# Altium PCB SDP21_Main_Board_PCB.PcbDoc
Units mil, origin at the board's own origin, x right, y up, seen from the top; angles counter-clockwise.
Board outline 3300 x 3200 mil, 2 copper layers (Top Layer, Bottom Layer); 35 components, 85 nets, 246 pads, 33 vias.
Unrouted connection lines stored in the file: 34.
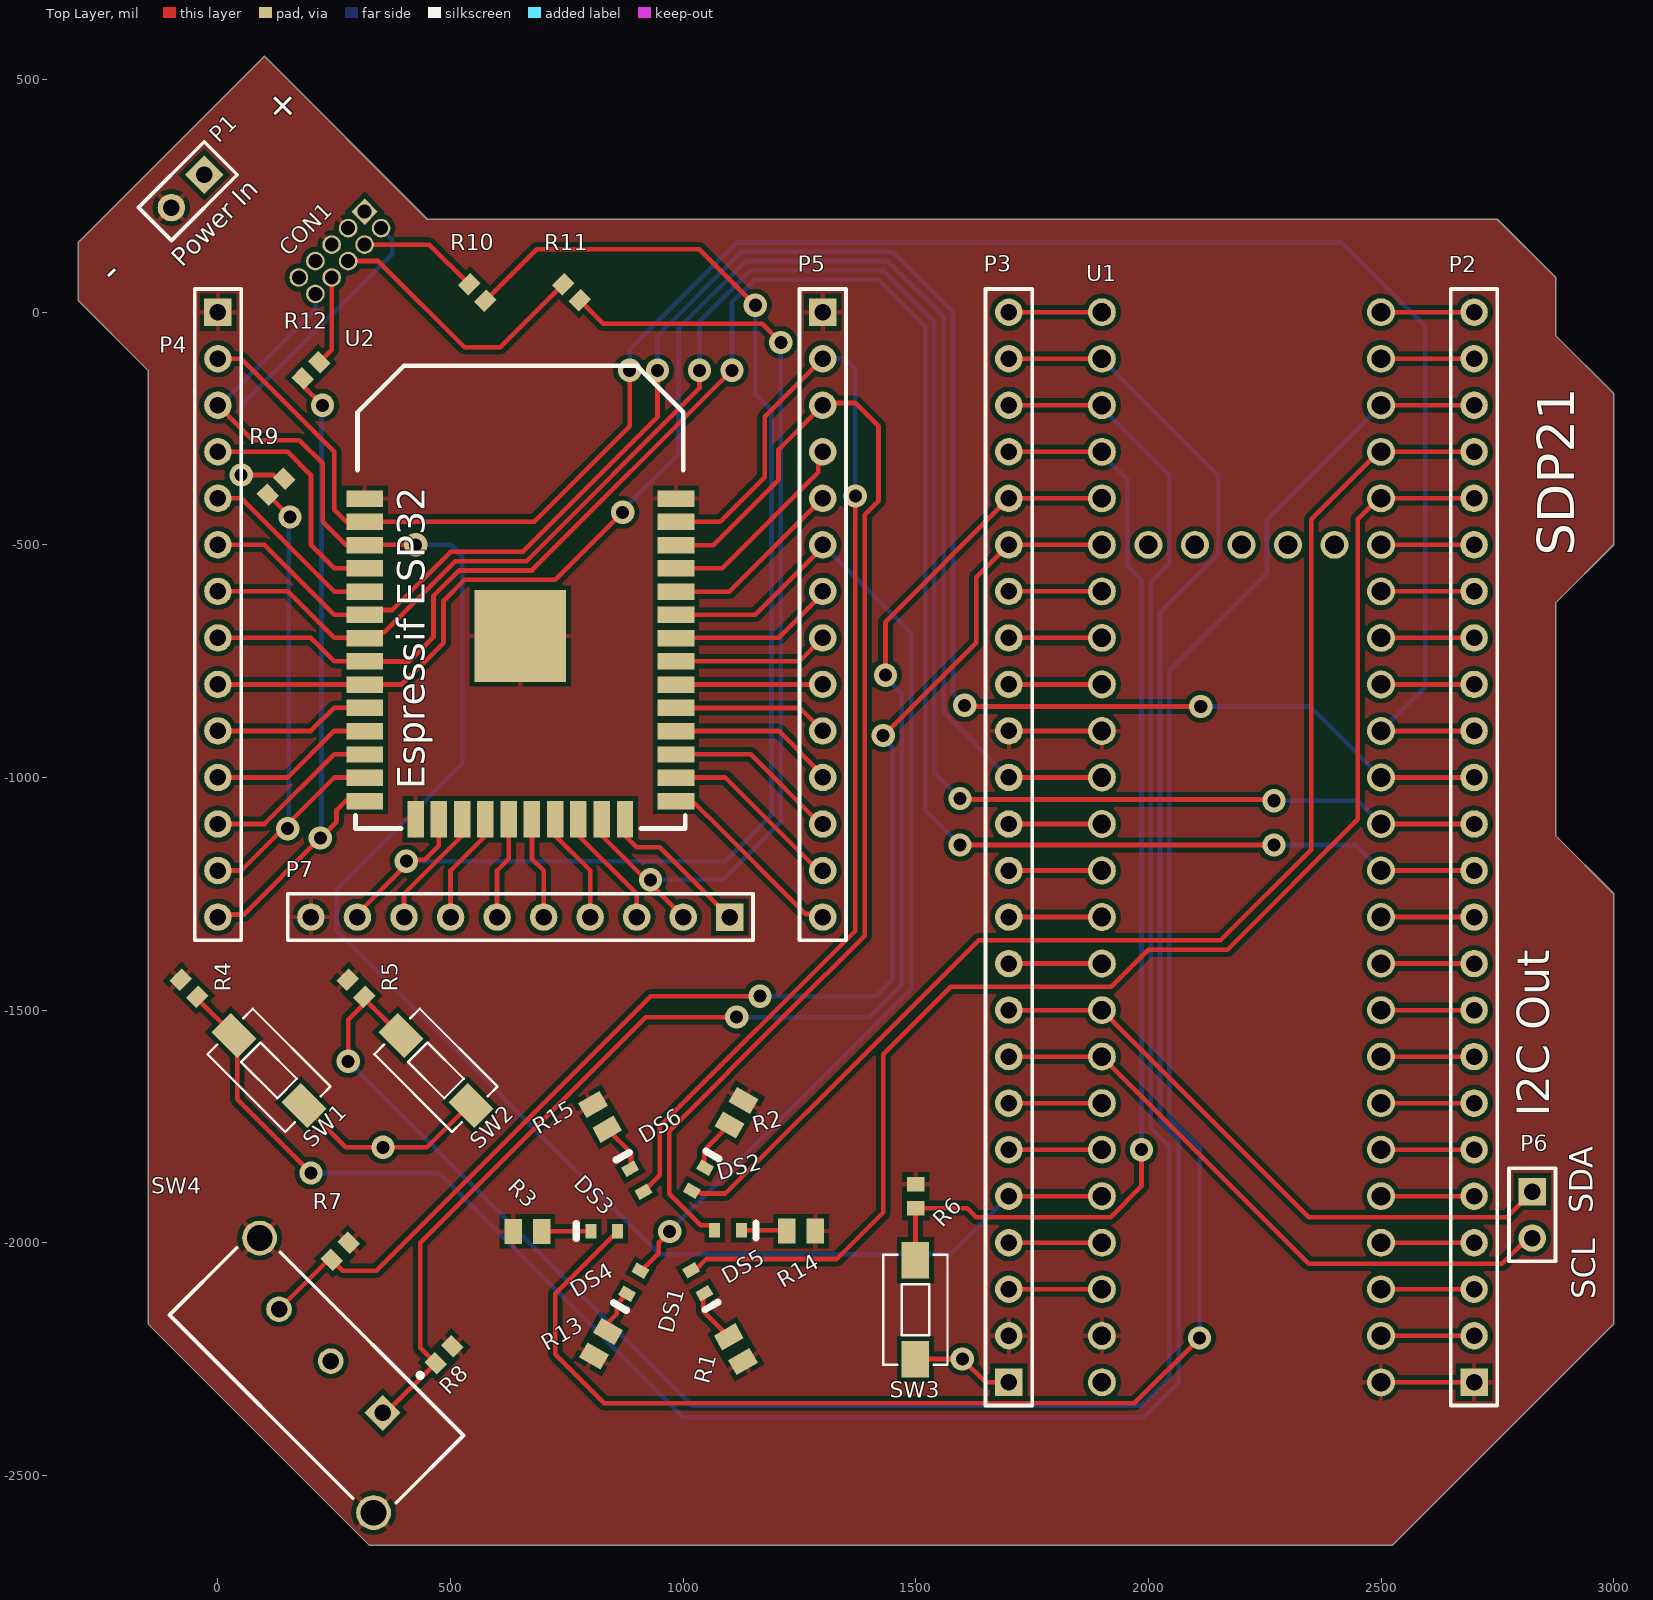
[diagram p0: Top Layer view]
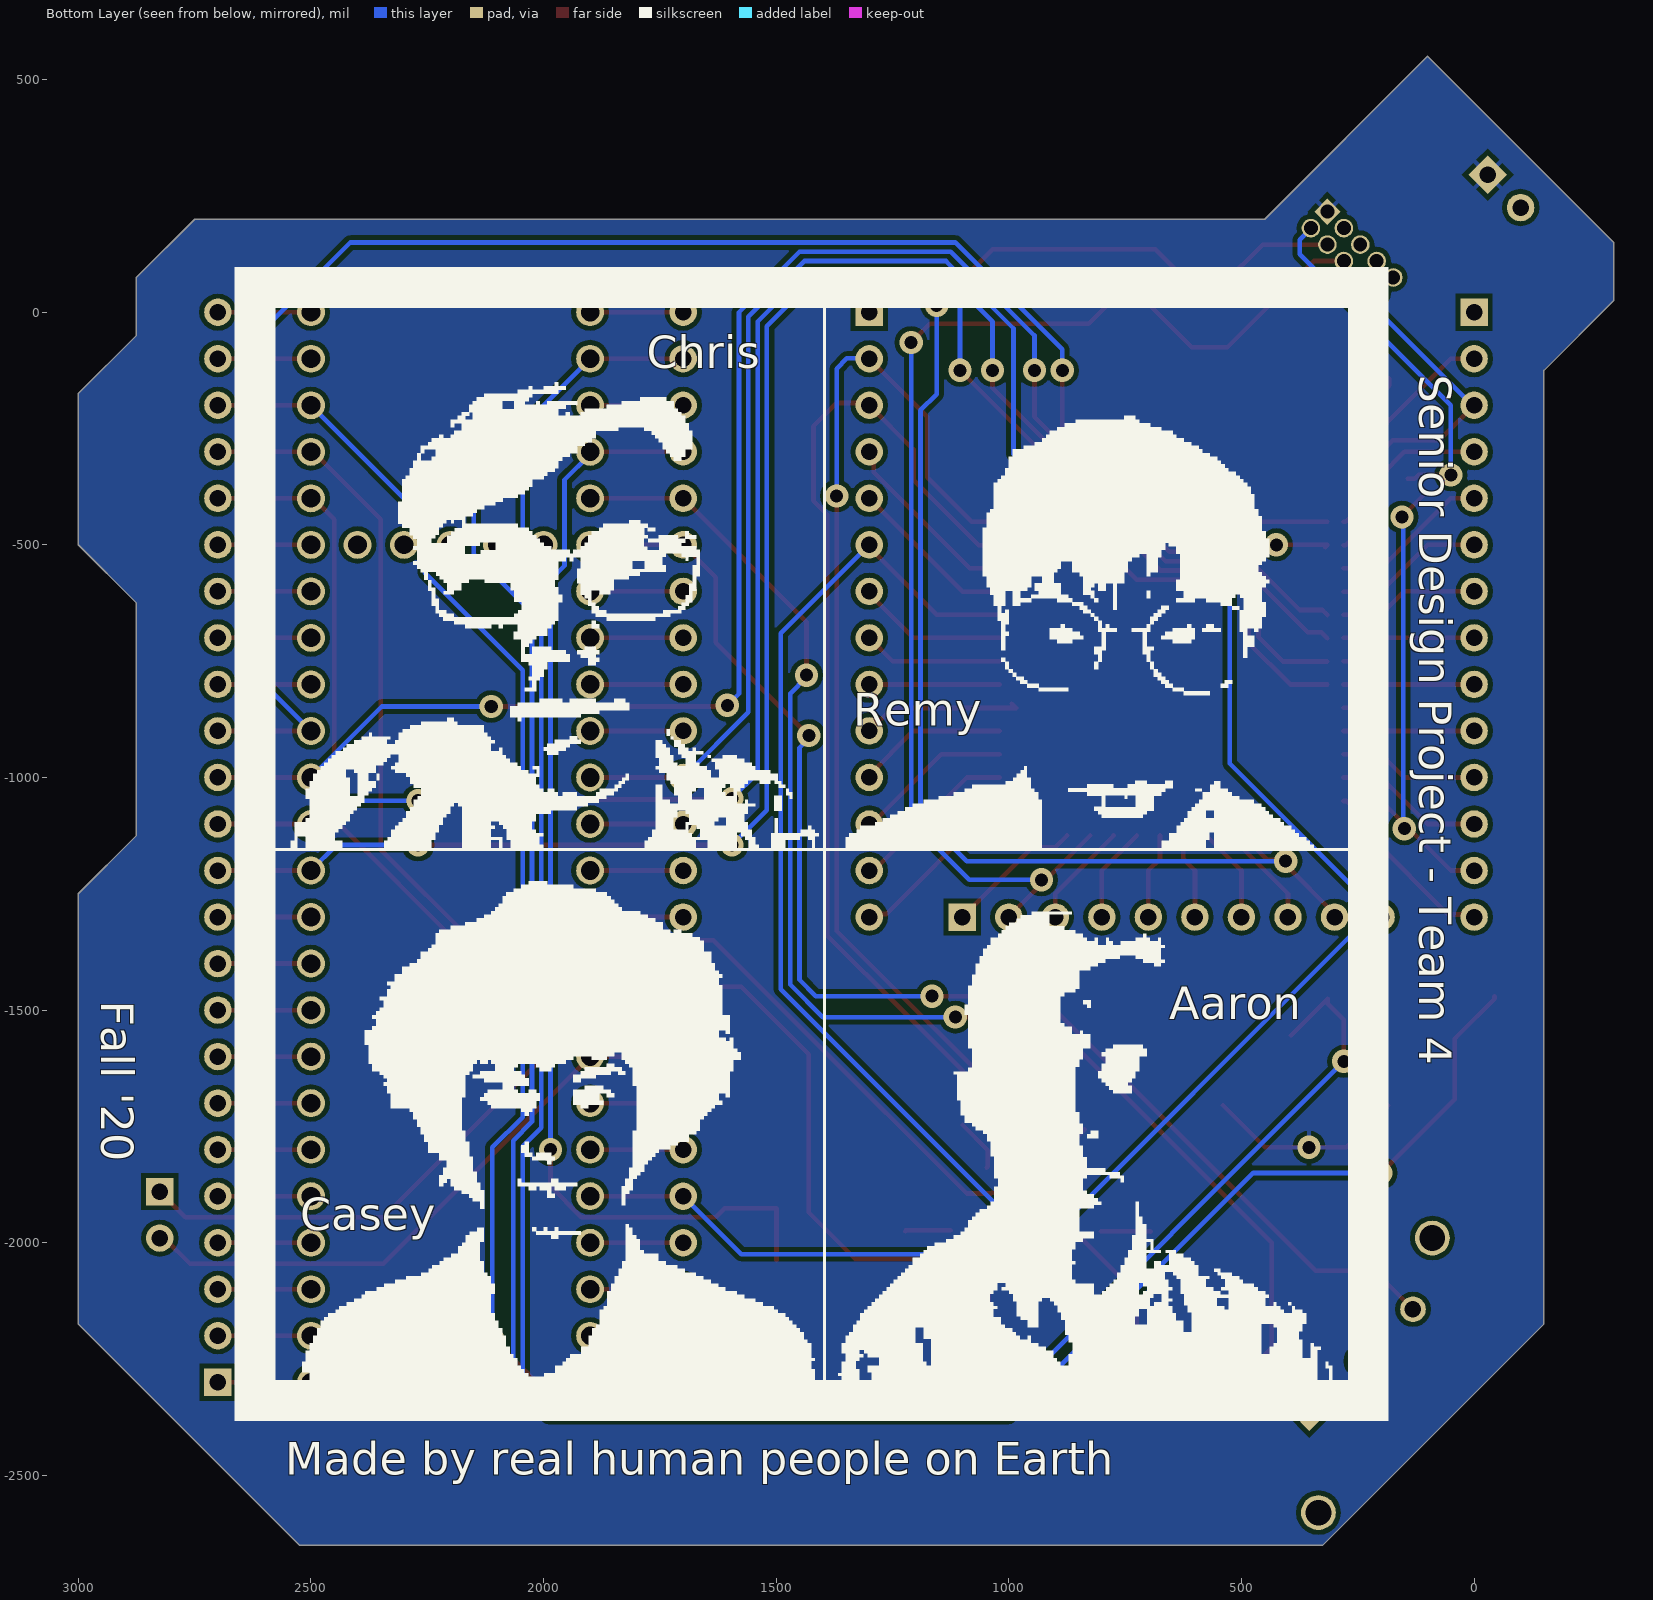
[diagram p1: Bottom Layer view, seen from below]

## Layer stack, top to bottom
Top Solder: solder mask 0.4, Solder Resist, Dk 3.5
Top Layer: signal copper 1.4
Dielectric 1: dielectric 12.6, FR-4, Dk 4.8
Bottom Layer: signal copper 1.4
Bottom Solder: solder mask 0.4, Solder Resist, Dk 3.5

## Board outline
-150,-2175 325,-2650 2525,-2650 3000,-2175 3000,-1250 2875,-1125 2875,-625 3000,-500 3000,-175 2875,-50 2875,75 2750,200 450,200 100,550 -300,150 -300,25 -150,-125

## Design rules (kind name [scope] priority, off if disabled: settings)
Clearance [All] p1: gap=10 ignorepadtopadclearanceinfootprint=FALSE except(0: Arc-Hole Track-Hole SMDPad-Hole THPad-Hole Via-Hole Fill-Hole Poly-Hole Region-Hole Text-Hole; 6: SMDPad-SMDPad)
MinimumSolderMaskSliver [All] p1: minsoldermaskwidth=3
PolygonConnect [All] p1: connectstyle=Relief reliefconductorwidth=10 reliefentries=4 polygonreliefangle="90 Angle" airgapwidth=10
RoutingVias [All] p1: holewidth=28 width=50 viastyle="Through Hole" minholewidth=28 minwidth=50 maxholewidth=28 maxwidth=50
SilkToSilkClearance [All] p1: silktosilkclearance=5
SilkToSolderMaskClearance [IsPad] p1: minsilkscreentomaskgap=0 clearancetoexposedcopper=TRUE
SolderMaskExpansion TentVia [IsVia] p1: expansion=4 istentingtop=TRUE
SolderMaskExpansion SolderMaskExpansion_1 [All] p2: expansion=0 istentingtop=FALSE
Width [All] p1: maxlimit=10 minlimit=10 preferedwidth=10
27 further rules are at their usual default settings.

## Components (designator, comment, footprint, x,y, rotation, side; value= is the part's Value field where it differs from the comment)
CON1 "JTAG Connector" "5x2 - 50mil" 315.36,216.07 r315 top
DS1 "TLMS1000-GS08" VISH-TLMS1000_V 1031.15,-2083.58 r300 top
DS2 "TLMS1000-GS08" VISH-TLMS1000_V 1032.9,-1863.34 r60 top
DS3 "TLMS1000-GS08" VISH-TLMS1000_V 830.44,-1975.24 r180 top
DS4 "TLMY1000-GS08" VISH-TLMY1000_V 893.95,-2085.24 r240 top
DS5 "TLMY1000-GS08" VISH-TLMY1000_V 1096.41,-1973.35 r0 top
DS6 "TLMY1000-GS08" VISH-TLMY1000_V 900.16,-1866.03 r120 top
P1 "Header 2" HDR1X2 -29.29,295.71 r225 top
P2 "Header 24" HDR1X24 2700,-2300 r90 top
P3 "Header 24" HDR1X24 1700,-2300 r90 top
P4 "Header 14" HDR1X14 0,0 r270 top
P5 "Header 14" HDR1X14 1300,0 r270 top
P6 "Header 2" HDR1X2 2825,-1890 r270 top
P7 "Header 10" HDR1X10 1100,-1300 r180 top
R1 "RR1220P-331-D" RESC2013X50X40LL20T20 1113.23,-2228.64 r120 top
R2 "RR1220P-331-D" RESC2013X50X40LL20T20 1114.66,-1720.49 r240 top
R3 "RR1220P-331-D" RESC2013X50X40LL20T20 665.14,-1975.72 r0 top
R4 "CRCW060310K0FKEA" RESC1609X50X30NL8T20 -62.13,-1452.74 r315 top
R5 "CRCW060310K0FKEA" RESC1609X50X30NL8T20 296.69,-1452.74 r315 top
R6 "CRCW060310K0FKEA" RESC1609X50X30NL8T20 1500,-1900 r270 top
R7 "CRCW060310K0FKEA" RESC1609X50X30NL8T20 262.93,-2018.5 r225 top
R8 "CRCW060310K0FKEA" RESC1609X50X30NL8T20 486.06,-2240.79 r225 top
R9 "CRCW0603100RFKEA" RESC1609X50X30NL10T20 125,-375 r225 top
R10 "CRCW0603100RFKEA" RESC1609X50X30NL10T20 557.6,42.4 r315 top
R11 "CRCW0603100RFKEA" RESC1609X50X30NL10T20 760,43 r315 top
R12 "CRCW0603100RFKEA" RESC1609X50X30NL10T20 200,-125 r225 top
R13 "RR1220P-331-D" RESC2013X50X40LL20T20 823.21,-2217.3 r60 top
R14 "RR1220P-331-D" RESC2013X50X40LL20T20 1253.5,-1975.03 r180 top
R15 "RR1220P-331-D" RESC2013X50X40LL20T20 821.52,-1729.41 r300 top
SW1 "434123043816" 434123043816 109.72,-1629.52 r315 top
SW2 "434123043816" 434123043816 468.54,-1629.52 r315 top
SW3 "434123043816" 434123043816 1499.26,-2144.06 r270 top
SW4 "1825255-1" TECO-1825255-1_V 212.07,-2285 r135 top
U1 "Teensy 4.1 Socket" "Teensy 4.1 Socket" 2500,-2300 r90 top
U2 "ESP32-WROOM-32 Espressif Systems" "Espressif ESP32 Castellated" 650,-695.91 r0 top

## Footprints (in the part's own frame and the unit in brackets; to place one, negate y for a bottom-side part, rotate by r counter-clockwise, add the part's x,y. Pads: shape width x height; smd on the part's side, far side on the other; paste and mask are expansions set on the pad)
"5x2 - 50mil" [mil]
  rect 40x40 hole 30: 1(0,0)
  round 40 hole 30: 2(50,0) 3(0,-50) 4(50,-50) 5(0,-100) 6(50,-100) 7(0,-150) 8(50,-150) 9(0,-200) 10(50,-200)
434123043816 [mm] "6.0*3.5mm vertical type, J-Bend SMD, height 4.3mm, black actuator, 160gf, T&R"
  rect 2x1.5 smd: 1(-2.7,0) 2(2.7,0)
  silkscreen extent -3,-1.75 3,1.75, body extent -3.65,-1.75 3.65,1.75, height 4.3
"Espressif ESP32 Castellated" [mm]
  rect 2x0.9 smd: 1(-8.5,7.5) 2(-8.5,6.23) 3(-8.5,4.96) 4(-8.5,3.69) 4(-8.5,3.69) 5(-8.5,2.42) 6(-8.5,1.15) 7(-8.5,-0.12) 8(-8.5,-1.39) 9(-8.5,-2.66) 10(-8.5,-3.93) 11(-8.5,-5.2) 12(-8.5,-6.47) 13(-8.5,-7.74) 14(-8.5,-9.01) 25(8.5,-9.01) 26(8.5,-7.74) 27(8.5,-6.47) 28(8.5,-5.2) 29(8.5,-3.93) 30(8.5,-2.66) 31(8.5,-1.39) 32(8.5,-0.12) 33(8.5,1.15) 34(8.5,2.42) 35(8.5,3.69) 36(8.5,4.96) 37(8.5,6.23) 38(8.5,7.5)
  rect 0.9x2 smd: 15(-5.715,-10.01) 16(-4.445,-10.01) 17(-3.175,-10.01) 18(-1.905,-10.01) 19(-0.635,-10.01) 20(0.635,-10.01) 21(1.905,-10.01) 22(3.175,-10.01) 23(4.445,-10.01) 24(5.715,-10.01)
  rect 5x5 smd: 39(0,0)
  silkscreen extent -9,-10.51 9,14.76
HDR1X2 [mm] "Connector; Header; 2 Position"
  rect 1.5x1.5 hole 0.9: 1(0,0)
  round 1.5 hole 0.9: 2(2.54,0)
  silkscreen extent -1.27,-1.27 3.81,1.27
HDR1X10 [mm] "Connector; Header; 10 Position"
  rect 1.5x1.5 hole 0.9: 1(0,0)
  round 1.5 hole 0.9: 2(2.54,0) 3(5.08,0) 4(7.62,0) 5(10.16,0) 6(12.7,0) 7(15.24,0) 8(17.78,0) 9(20.32,0) 10(22.86,0)
  silkscreen extent -1.27,-1.27 24.13,1.27
HDR1X14 [mm] "Connector; Header; 14 Position"
  rect 1.5x1.5 hole 0.9: 1(0,0)
  round 1.5 hole 0.9: 2(2.54,0) 3(5.08,0) 4(7.62,0) 5(10.16,0) 6(12.7,0) 7(15.24,0) 8(17.78,0) 9(20.32,0) 10(22.86,0) 11(25.4,0) 12(27.94,0) 13(30.48,0) 14(33.02,0)
  silkscreen extent -1.27,-1.27 34.29,1.27
HDR1X24 [mm] "Connector; Header; 24 Position"
  rect 1.5x1.5 hole 0.9: 1(0,0)
  round 1.5 hole 0.9: 2(2.54,0) 3(5.08,0) 4(7.62,0) 5(10.16,0) 6(12.7,0) 7(15.24,0) 8(17.78,0) 9(20.32,0) 10(22.86,0) 11(25.4,0) 12(27.94,0) 13(30.48,0) 14(33.02,0) 15(35.56,0) 16(38.1,0) 17(40.64,0) 18(43.18,0) 19(45.72,0) 20(48.26,0) 21(50.8,0) 22(53.34,0) 23(55.88,0) 24(58.42,0)
  silkscreen extent -1.27,-1.27 59.69,1.27
RESC1609X50X30NL8T20 [mm] "Chip Resistor, 2-Leads, Body 1.65x0.95mm, IPC Medium Density"
  rect 0.8x0.95 smd: 1(-0.65,0) 2(0.65,0)
  body extent -0.82,-0.47 0.82,0.48, height 0.5
RESC1609X50X30NL10T20 [mm] "Chip Resistor, 2-Leads, Body 1.55x0.85mm, IPC Medium Density"
  rect 0.8x0.95 smd: 1(-0.625,0) 2(0.625,0)
  body extent -0.82,-0.48 0.82,0.47, height 0.5
RESC2013X50X40LL20T20 [mm] "Chip Resistor, 2-Leads, Body 2.00x1.25mm, IPC High Density"
  rect 0.95x1.35 smd: 1(-0.775,0) 2(0.775,0)
  body extent -1.1,-0.73 1.1,0.73, height 0.5
TECO-1825255-1_V [mm] "THD, 5-Leads, Body 6.7x16mm, Pitch 4mm"
  rect 1.4x1.4 hole 0.9: 1(-4,-1.1)
  round 1.4 hole 0.9: 2(0,-1.1) 3(4,-1.1)
  round 1.9 hole 1.4: MH1(-7.5,3.1) MH2(7.5,-3.1)
  silkscreen extent -8,-4.12 8,3.35, body extent -8,-3.35 8,3.35, height 12
"Teensy 4.1 Socket" [mil]
  round 60 hole 40: 0(100,0) 1(200,0) 2(300,0) 3(400,0) 3.3-1(1400,0) 3.3-2(200,600) 4(500,0) 5(600,0) 6(700,0) 7(800,0) 8(900,0) 9(1000,0) 10(1100,0) 11(1200,0) 12(1300,0) 13(1300,600) 14(1200,600) 15(1100,600) 16(1000,600) 17(900,600) 18(800,600) 19(700,600) 20(600,600) 21(500,600) 22(400,600) 23(300,600) 24(1500,0) 25(1600,0) 26(1700,0) 27(1800,0) 28(1900,0) 29(2000,0) 30(2100,0) 31(2200,0) 32(2300,0) 33(2300,600) 34(2200,600) 35(2100,600) 36(2000,600) 37(1900,600) 38(1800,600) 39(1700,600) 40(1600,600) 41(1500,600) GND1(0,0) GND2(1400,600) GND3(100,600) Mid1(1800,100) Mid2(1800,200) Mid3(1800,300) Mid4(1800,400) Mid5(1800,500) Vin(0,600)
VISH-TLMS1000_V [mm] "SMD, 2-Leads, Body 0.8x1.6mm"
  rect 0.6x0.8 smd: 1(-0.725,0) 2(0.725,0)
  silkscreen extent 1.52,-0.4 1.52,0.4, body extent -0.8,-0.4 0.8,0.4, height 0.65
VISH-TLMY1000_V [mm] "SMD, 2-Leads, Body 1.6x0.8mm"
  rect 0.6x0.8 smd: 1(-0.725,0) 2(0.725,0)
  silkscreen extent 1.53,-0.4 1.53,0.4, body extent -0.8,-0.4 0.8,0.4, height 0.65

## Part data
DS1 DS2 DS3: library part CMP-2000-07254-1, "Low Current LED, 40 mW, 1.8 V, -40 to 100 degC, 2-Pin SMD (0603), RoHS, Tape and Reel", Forward Current If=2mA, Forward Voltage=1.8V, LED Colour=Red, Manufacturer=Vishay, Package Description="2-Pin Surface Mount Device, Body 1.6 x 0.8 mm", Package Reference=TLMS1000, Automotive Qualification Standard=AEC-Q100, Bulb Size=1.6mmx0.8mm, Datasheet URL=https://datasheet.ciiva.com/5798/1698881-5798337.pdf, Datasheet Version="Rev. 1.7, 02/2011", LED Mounting=SMD, Lens Shape=Rectangular, Luminous Intensity=4mcd, Manufacturer URL=http://www.vishay.com/, Mounting Technology=SurfaceMount, MSL=MSL2-1year, Packaging=CutTape, Product Range=-, SVHC=ToBeAdvised, Viewing Angle=80°, Wavelength Typ=636nm
DS4 DS5 DS6: library part CMP-2000-07255-1, "Low Current LED, 40 mW, -40 to 100 degC, 2-Pin SMD, RoHS, Tape and Reel", Forward Current If=2mA, Forward Voltage=1.8V, LED Colour=Yellow, Manufacturer=Vishay, Package Description="2-Pin Surface Mount Device, Body 1.6 x 0.8 mm", Package Reference=TLMY1000, Automotive Qualification Standard=AEC-Q100, Bulb Size=1.6mmx0.8mm, Datasheet URL=http://www.vishay.com/docs/83172/tlmo1000.pdf, Datasheet Version="Rev. 2.0, 09/2013", LED Mounting=SMD, Lens Shape=Rectangular, Luminous Intensity=7.5mcd, Manufacturer URL=http://www.vishay.com/, Mounting Technology=SurfaceMount, MSL=MSL2-1year, Packaging=CutTape, Product Range=-, SVHC=ToBeAdvised, Viewing Angle=80°, Wavelength Typ=595nm
P1 P6: "Header, 2-Pin", LatestRevisionDate=17-Jul-2002, LatestRevisionNote="Re-released for DXP Platform.", Publisher="Altium Limited"
P2 P3: "Header, 24-Pin", LatestRevisionDate=17-Jul-2002, LatestRevisionNote="Re-released for DXP Platform.", Publisher="Altium Limited"
P4 P5: "Header, 14-Pin", LatestRevisionDate=17-Jul-2002, LatestRevisionNote="Re-released for DXP Platform.", Publisher="Altium Limited"
P7: "Header, 10-Pin", LatestRevisionDate=17-Jul-2002, LatestRevisionNote="Re-released for DXP Platform.", Publisher="Altium Limited"
R1 R2 R3 R13 R14 R15: library part CMP-2001-03378-1, Manufacturer=Susumu, Part Number=RR1220P-331-D
R4 R5 R6 R7 R8: library part CMP-1666-00005-4, "Chip Resistor, 10 KOhm, +/- 1%, 100 mW, -55 to 155 degC, 0603 (1608 Metric), RoHS, Tape and Reel", Manufacturer="Vishay Semiconductor", Max Operating Temperature="155 degC", Min Operating Temperature="-55 degC", Package Quantity=5000, Voltage Rating="75 V", ComponentLink1Description="Manufacturer URL", ComponentLink1URL=http://www.vishay.com/, ComponentLink2Description=Datasheet, ComponentLink2URL=https://datasheet.ciiva.com/11809/0900766b80d98afc-11809037.pdf, DatasheetVersion=06/2012, Height="0.45 mm", Length="1.55 mm", Mounting Technology="Surface Mount", PackageDescription="2-Pin Surface Mount Device, Body 1.575 x 0.85 mm", PackageReference=0603, Packaging="Tape and Reel", REACH SVHC=Unknown, RoHSCompliant=true
R9 R10 R11 R12: library part CMP-2000-03824-1, Manufacturer="Vishay Dale", Part Number=CRCW0603100RFKEA
SW1 SW2 SW3: library part CMP-1460-00005-1, "WS-TASV J-Bend SMD Tact Switch 6.0X3.5 mm", Manufacturer="Wuerth Elektronik", ComponentLink1Description="Manufacturer URL", ComponentLink1URL=http://www.we-online.com, ComponentLink2Description=Datasheet, ComponentLink2URL=http://katalog.we-online.de/em/datasheet/434123043816.pdf, NoPins=02, PackageReference=434123043816, PartNumber=434123043816
SW4: library part CMP-2100-03576-1, "Slide Switch, SPDT, 125 V, -20 to 85 degC, 5-Pin THD, RoHS, Tray", Case/Package=300, Current Rating=300mA, Flammability Rating=UL94HB, Manufacturer="TE Connectivity", Max Operating Temperature=85degC, Max Voltage Rating (AC)=125V, Min Operating Temperature=-20degC, Operating Force=600gf, Package Description="5-Pin Through Hole Device, Body 6.7 x 16 mm, Pitch 4 mm", Package Quantity=560, Actuator Length=4.5mm, Contact Material=Copper, Contact Plating=Silver, Contact Style=Shorting, Datasheet URL=http://www.te.com/commerce/DocumentDelivery/DDEController?Action=showdoc&DocId=Customer+Drawing%7F1825255%7FA4%7Fpdf%7FEnglish%7FENG_CD_1825255_A4_baseFilename.pdf%7F1825255-1, Datasheet Version="Rev. A4, 03/2014", Depth=6.7mm, Electrical Life=15000Cycles, ELV=Compliant, Lead Free=LeadFree, Length=16mm, Manufacturer URL=http://www.te.com/, Max Current Rating=300mA, Mount=ThroughHole, Number of Positions=2, Orientation=Vertical, Package Reference=1825255-1, Packaging=Bulk, Radiation Hardening=No, REACH SVHC=Unknown, RoHSCompliant=true, Switch Travel=4mm, Termination=PCPins, Throw Configuration=SPDT, Voltage Rating (AC)=125V
U1: "Teensy 4.1"
U2: "ESP32 BGA mounted on PCB w/ castellated holes"

## Via types
v1: diameter 50, hole 28, Top Layer to Bottom Layer, tented both sides, 33 vias

## Nets (pads, with @x,y where several pads share a name; then routed paths per layer and width w, separated by ;. In a path a pad name is that pad's centre, name@x,y a point inside that pad or via, vN(x,y) a via of type N, cw(c..) or ccw(c..) an arc to the next point about the centre after c; other vN are vias at no path point)
3.3-1: P2.15 P4.2 U1.3.3-1 U2.2 | length 4308.1
  Top Layer w10: P4.2 50,-100 250,-300 250,-425 275.63,-450.63 U2.2@280.67,-450.63 ; U2.2 315.98,-450 680,-450 885,-245 v1(885,-125) ; U1.3.3-1 P2.15
  Bottom Layer w10: v1(885,-125) 885,-80 1115,150 2415,150 2595,-30 2595,-805 U1.3.3-1
3.3-2: P3.3 U1.3.3-2 | length 200
  Top Layer w10: P3.3 U1.3.3-2
CLK: P7.5 U2.20 | length 185.7
  Top Layer w10: U2.20@675,-1124.69 675,-1175 700,-1200 P7.5
CMD: P7.6 U2.19 | length 185.7
  Top Layer w10: P7.6 600,-1200 625,-1175 U2.19@625,-1124.69
CS: P2.12 P4.8 U1.10 U2.8 | length 4298.8
  Top Layer w10: P4.8 200,-700 250,-750 U2.8@280.67,-750 ; U2.8 411.01,-750.63 463.29,-698.35 463.29,-610 518.28,-555 675,-555 v1(1105,-125) ; v1(1595,-1145) v1(2270,-1145) ; U1.10 P2.12
  Bottom Layer w10: v1(1105,-125) 1105,21.57 1153.43,70 1420,70 1520,-30 1520,-1070 v1(1595,-1145) ; v1(2270,-1145) 2445,-1145 U1.10
EN: CON1.10 P3.5 P4.3 U1.22 U2.3 | length 3934.9
  Top Layer w10: P4.3 75,-275 175,-275 225,-325 225,-450 275.63,-500.63 U2.3@280.67,-500.63 ; U2.3@319.72,-505 U2.3 315.98,-500 v1(425,-500) ; P3.5 U1.22
  Bottom Layer w10: P4.3 4.38,-200 209.29,4.91 CON1.10 ; v1(425,-500) 500,-500 525,-525 525,-970 255,-1240 255,-1330 950,-2025 1575,-2025 P3.5
GND: CON1.3 CON1.5 P1.2 P2.1 P3.2 P3.15 P4.1 P5.1 P7.10 R1.1 R2.1 R3.1 R4.1 R5.1 R6.1 R7.1 R8.1 R13.1 R14.1 R15.1 SW4.MH1 SW4.MH2 U1.GND1 U1.GND2 U1.GND3 U2.1 U2.15 U2.38 U2.39 | length 400.3
  Top Layer w10: U2.15@425,-1125 U2.15@425,-1124.69 ; P3.15 U1.GND2 ; U1.GND1 P2.1
IO0: P5.14 U2.25 | length 384
  Top Layer w10: U2.25@1019.33,-1050.63 1050.42,-1081.72 1051.72,-1081.72 1263.51,-1293.51 1293.51,-1293.51 P5.14
IO2: P7.1 U2.24 | length 297.8
  Top Layer w10: U2.24@875,-1124.69 875,-1125 900,-1150 950,-1150 P7.1
IO4: P5.13 U2.26 | length 363.5
  Top Layer w10: U2.26@1019.33,-1000 1090,-1000 1290,-1200 P5.13
IO5: P5.10 U2.29 | length 348.2
  Top Layer w10: U2.29@993.43,-841.84 U2.29 1250.63,-850.63 P5.10
IO16: P5.12 U2.27 | length 342.8
  Top Layer w10: U2.27@1019.33,-950 1145,-950 1295,-1100 P5.12
IO17: P5.11 U2.28 | length 325
  Top Layer w10: U2.28@1019.33,-900 1205,-900 1300,-995 P5.11
IO18: P5.9 U2.30 | length 280.7
  Top Layer w10: U2.30@1019.33,-800 P5.9
IO19: P5.8 U2.31 | length 301.4
  Top Layer w10: U2.31@1019.33,-750 1250,-750 P5.8
IO21: DS4.1 P5.6 U2.33 | length 2226.8
  Top Layer w10: DS4.1 909.66,-2060.52 947.35,-2022.83 947.35,-1999.65 v1(971,-1976) ; U2.33@1019.33,-650 1155,-650 1300,-505 P5.6
  Bottom Layer w10: v1(971,-1976) 971,-1974 1490,-1455 1490,-690 P5.6
IO22: DS5.1 P5.3 U2.36 | length 2555.1
  Top Layer w10: U2.36@1019.33,-500.63 1064.37,-500.63 1205,-360 1205,-295 P5.3 1305,-195 1370,-195 1420,-245 1420,-405 1390,-435 1390,-1340 1225,-1505 970,-1760 970,-1895 1037.6,-1962.6 1061.06,-1962.6 1067.87,-1969.41 DS5.1
IO23: DS6.1 P5.2 U2.37 | length 2539.8
  Top Layer w10: DS6.1 950,-1855.18 950,-1750 1370,-1330 v1(1370,-395) ; U2.37@1019.33,-450.63 1079.37,-450.63 1175,-355 1175,-225 P5.2
  Bottom Layer w10: P5.2 1300.86,-99.14 1347.97,-99.14 1370,-121.17 v1(1370,-395)
IO25: P4.10 U2.10 | length 301.4
  Top Layer w10: P4.10 200,-900 250,-850 U2.10@280.67,-850
IO26: P4.11 U2.11 | length 322.1
  Top Layer w10: P4.11 150,-1000 250,-900 U2.11@280.67,-900
IO27: P4.12 U2.12 | length 342.8
  Top Layer w10: P4.12 100,-1100 250,-950 U2.12@280.67,-950
MISO: P2.14 P4.6 U1.12 U2.6 | length 4101.7
  Top Layer w10: P4.6 100,-500 250,-650 U2.6@280.67,-650 ; U2.6 325.98,-640 375,-640 500,-515 655,-515 945,-225 v1(945,-125) ; v1(1605,-845) 1607.5,-847.5 v1(2112.5,-847.5) ; U1.12 P2.14
  Bottom Layer w10: v1(945,-125) 945,-50 1125,130 1450,130 1580,0 1580,-820 v1(1605,-845) ; v1(2112.5,-847.5) 2347.5,-847.5 U1.12
MOSI: P2.13 P4.7 U1.11 U2.7 | length 4179.2
  Top Layer w10: P4.7 150,-600 250,-700 U2.7@280.67,-700 ; U2.7 328.07,-687.91 357.09,-687.91 510,-535 663.28,-535 1035,-163.28 v1(1035,-125) ; v1(1595,-1045) 1597.5,-1047.5 2267.5,-1047.5 v1(2270,-1050) ; U1.11 P2.13
  Bottom Layer w10: v1(1035,-125) 1035,-20.15 1145.15,90 1430,90 1540,-20 1540,-990 v1(1595,-1045) ; v1(2270,-1050) 2450,-1050 U1.11
MTCK: P7.9 R10.2 U2.16 | length 2921.6
  Top Layer w10: P7.9@304.53,-1295.47 P7.9 300,-1292.5 405,-1187.5 v1(405,-1180) 408.28,-1176.72 445,-1176.72 475,-1146.72 U2.16 ; R10.2 580,30 685,135 1035,135 v1(1155,15)
  Bottom Layer w10: v1(405,-1180) 1090,-1180 1190,-1080 1190,-211 1155,-176 v1(1155,15)
MTDI: P4.14 R12.2 U2.14 | length 1405.8
  Top Layer w10: P4.14 5.35,-1294.65 55.35,-1294.65 v1(220,-1130) 255,-1095 255,-1070 274.37,-1050.63 U2.14@280.67,-1050.63 ; R12.2 182.6,-157.6 v1(225,-200)
  Bottom Layer w10: v1(220,-1130) 222.5,-1127.5 222.5,-202.5 v1(225,-200)
MTDO: P7.2 R11.2 U2.23 | length 2079.7
  Top Layer w10: R11.2 828,-25 1170,-25 v1(1210,-65) ; U2.23@825,-1124.69 1000,-1299.69 P7.2
  Bottom Layer w10: v1(930,-1220) 1085,-1220 1210,-1095 v1(1210,-65)
MTMS: P4.13 R9.2 U2.13 | length 1102.8
  Top Layer w10: P4.13 50,-1200 250,-1000 U2.13@280.67,-1000 ; R9.2 107.6,-392.6 v1(155,-440)
  Bottom Layer w10: v1(150,-1110) 152.5,-1107.5 152.5,-442.5 v1(155,-440)
NC: P5.7 U2.32 | length 325
  Top Layer w10: U2.32@1019.33,-700 1205,-700 1300,-605 P5.7
NetCON1_2: CON1.2 R9.1 | length 770.9
  Top Layer w10: v1(50,-350) 119.6,-350 127.2,-357.6 R9.1
  Bottom Layer w10: v1(50,-350) 50,-200 375,125 375,155.5 350.71,179.79 CON1.2
NetCON1_4: CON1.4 R10.1 | length 260.3
  Top Layer w10: CON1.4 454.64,145.36 R10.1
NetCON1_6: CON1.6 R11.1 | length 595.3
  Top Layer w10: CON1.6 345,110 530,-75 607.2,-75 R11.1
NetCON1_8: CON1.8 R12.1 | length 193.5
  Top Layer w10: R12.1 244.64,-80.36 CON1.8
NetDS1_2: DS1.2 R1.2 | length 117.3
  Top Layer w10: DS1.2 1043.45,-2110.27 1043.45,-2147.69 R1.2
NetDS2_2: DS2.2 R2.2 | length 115
  Top Layer w10: DS2.2 1045.21,-1836.66 1045.21,-1801.11 R2.2
NetDS3_2: DS3.2 R3.2 | length 106.4
  Top Layer w10: R3.2 696.14,-1975.24 DS3.2
NetDS4_2: DS4.2 R13.2 | length 98
  Top Layer w10: R13.2 838.47,-2171.9 857.23,-2153.14 857.23,-2132.41 DS4.2
NetDS5_2: DS5.2 R14.2 | length 98.7
  Top Layer w10: DS5.2 1221.3,-1973.35 R14.2
NetDS6_2: DS6.2 R15.2 | length 107.5
  Top Layer w10: R15.2 887.86,-1806.92 887.86,-1839.35 DS6.2
RXD0: P5.5 U2.34 | length 363.8
  Top Layer w10: U2.34@1019.33,-600.63 1099.37,-600.63 P5.5
SCK: P3.14 P4.9 U1.13 U2.9 | length 3414
  Top Layer w10: P4.9 U2.9@280.67,-800 ; U2.9 315.98,-800 395,-800 485,-710 485,-620 530,-575 725,-575 v1(870,-430) ; P3.14 U1.13
  Bottom Layer w10: v1(870,-430) 870,-425 990,-305 990,-35 1135,110 1440,110 1560,-10 1560,-860 P3.14
SCL: P3.8 P6.2 U1.19 | length 1332.1
  Top Layer w10: P3.8 U1.19 2345,-2045 2760,-2045 2815,-1990 P6.2
SD0: P7.4 U2.21 | length 206.4
  Top Layer w10: U2.21@725,-1124.69 725,-1125 800,-1200 P7.4
SD1: P7.3 U2.22 | length 227.1
  Top Layer w10: U2.22@775,-1124.69 775,-1125 900,-1250 P7.3
SD2: P7.8 U2.17 | length 227.2
  Top Layer w10: P7.8 400,-1250 U2.17@525.31,-1124.69
SD3: P7.7 U2.18 | length 206.5
  Top Layer w10: P7.7 500,-1200 U2.18@575.31,-1124.69
SDA: P3.9 P6.1 U1.18 | length 1332.1
  Top Layer w10: P3.9 U1.18 2345,-1945 2770,-1945 P6.1
SENSOR_VN: P4.5 U2.5 | length 363.8
  Top Layer w10: P4.5 50,-400 250.63,-600.63 U2.5@280.67,-600.63
SENSOR_VP: P4.4 U2.4 | length 472.1
  Top Layer w10: P4.4 150,-300 200,-350 200,-500 250,-550 U2.4@280.67,-550
T0: P2.2 U1.0 | length 200
  Top Layer w10: U1.0 P2.2
T1: P2.3 U1.1 | length 200
  Top Layer w10: U1.1 P2.3
T2: P2.4 U1.2 | length 200
  Top Layer w10: U1.2 P2.4
T3: P2.5 U1.3 | length 200
  Top Layer w10: U1.3 P2.5
T4: P2.6 U1.4 | length 200
  Top Layer w10: U1.4 P2.6
T5: P2.7 U1.5 | length 200
  Top Layer w10: U1.5 P2.7
T6: P2.8 U1.6 | length 200
  Top Layer w10: U1.6 P2.8
T7: P2.9 U1.7 | length 200
  Top Layer w10: U1.7 P2.9
T8: P2.10 U1.8 | length 200
  Top Layer w10: U1.8 P2.10
T9: P2.11 U1.9 | length 200
  Top Layer w10: U1.9 P2.11
T14: P3.13 U1.14 | length 200
  Top Layer w10: P3.13 U1.14
T15: P3.12 U1.15 | length 200
  Top Layer w10: P3.12 U1.15
T16: P3.11 U1.16 | length 200
  Top Layer w10: P3.11 U1.16
T17: P3.10 U1.17 | length 200
  Top Layer w10: P3.10 U1.17
T20: P3.7 U1.20 | length 200
  Top Layer w10: P3.7 U1.20
T21: P3.6 U1.21 | length 200
  Top Layer w10: P3.6 U1.21
T23: P3.4 U1.23 | length 200
  Top Layer w10: P3.4 U1.23
T24: P2.16 U1.24 | length 200
  Top Layer w10: U1.24 P2.16
T25: P2.17 U1.25 | length 200
  Top Layer w10: U1.25 P2.17
T26: P2.18 U1.26 | length 200
  Top Layer w10: U1.26 P2.18
T27: P2.19 U1.27 | length 200
  Top Layer w10: U1.27 P2.19
T28: DS1.1 P2.20 U1.28 | length 2947.2
  Top Layer w10: DS1.1 1026.14,-2058.86 1050,-2035 1330,-2035 1430,-1935 1430,-1595 1575,-1450 1920,-1450 2000,-1370 2170,-1370 2450,-1090 2450,-445 2495,-400 U1.28 P2.20
T29: DS2.1 P2.21 U1.29 | length 2760.2
  Top Layer w10: DS2.1 1022.85,-1892.28 1037.08,-1892.28 1039.03,-1894.24 1090.76,-1894.24 1435,-1550 1635,-1350 2155,-1350 2350,-1155 2350,-445 2495,-300 U1.29 P2.21
T30: DS3.1 P2.22 U1.30 | length 4227.1
  Top Layer w10: DS3.1 725,-2109.22 725,-2179.28 725,-2240 830,-2345 1970,-2345 v1(2110,-2205) ; U1.30 P2.22
  Bottom Layer w10: v1(2110,-2205) 2110,-1795 2045,-1730 2045,-770 2255,-560 2255,-445 U1.30
T31: P2.23 U1.31 | length 200
  Top Layer w10: U1.31 P2.23
T32: P2.24 U1.32 | length 200
  Top Layer w10: U1.32 P2.24
T33: P3.24 U1.33 | length 200
  Top Layer w10: P3.24 U1.33
T34: P3.23 R4.2 SW1.1 U1.34 | length 5166.1
  Top Layer w10: R4.2 -44.03,-1475.77 SW1.1 41.51,-1561.31 41.51,-1691.51 v1(200,-1850) ; P3.23 U1.34
  Bottom Layer w10: v1(200,-1850) 475,-1850 1000,-2375 1990,-2375 2065.53,-2299.47 2065.53,-1780.53 2025,-1740 2025,-645 2150,-520 2150,-350 U1.34
T35: P3.22 R5.2 SW2.1 U1.35 | length 4739.3
  Top Layer w10: v1(280,-1610) 280,-1520.82 314.79,-1486.04 314.79,-1475.77 SW2.1 ; P3.22 U1.35
  Bottom Layer w10: v1(280,-1610) 1020,-2350 1985,-2350 2045,-2290 2045,-1792.71 2005,-1752.71 2005,-580 2045,-540 2045,-350 1900,-205 U1.35
T36: P3.21 R6.2 SW3.1 U1.36 | length 2460.5
  Top Layer w10: SW3.1 1499.26,-1926.63 R6.2@1500.3,-1925.59 ; R6.2 R6.2@1500.3,-1925.59 ; P3.21 U1.36 ; v1(1985,-1800) 1985,-1878.64 1918.64,-1945 1630,-1945 1610.59,-1925.59 R6.2@1500.3,-1925.59
  Bottom Layer w10: U1.36@1913.53,-300 U1.36 1900,-305 1955,-360 1955,-545 1985,-575 v1(1985,-1800)
T37: P3.20 R8.2 SW4.1 U1.37 | length 3064.9
  Top Layer w10: SW4.1 361.12,-2365.73 R8.2 435,-2225.92 435,-2000 920,-1515 v1(1115,-1515) ; v1(1435,-780) 1435,-665 P3.20 U1.37
  Bottom Layer w10: v1(1115,-1515) 1400,-1515 1470,-1445 1470,-819.6 1435,-784.6 v1(1435,-780)
T38: P3.19 R7.2 SW4.3 U1.38 | length 2886.4
  Top Layer w10: SW4.3 237.77,-2036.59 R7.2 268.24,-2060 340,-2060 930,-1470 v1(1165,-1470) ; v1(1430,-910) 1630,-710 1630,-570 P3.19 U1.38
  Bottom Layer w10: v1(1165,-1470) 1415,-1470 1450,-1435 1450,-935.86 1430,-915.86 v1(1430,-910)
T39: P3.18 U1.39 | length 200
  Top Layer w10: P3.18 U1.39
T40: P3.17 U1.40 | length 200
  Top Layer w10: P3.17 U1.40
T41: P3.16 U1.41 | length 200
  Top Layer w10: P3.16 U1.41
TXD0: P5.4 U2.35 | length 405
  Top Layer w10: U2.35@1019.33,-550.63 1084.37,-550.63 1290.61,-344.39 1290.61,-309.39 P5.4
Vin: CON1.1 P1.1 P3.1 SW1.2 SW2.2 SW3.2 SW4.2 U1.Vin | length 651.3
  Top Layer w10: SW1.2 184.88,-1704.88 275,-1795 v1(355,-1795) 449.37,-1795 SW2.2@539.69,-1704.68 ; SW3.2 1499.62,-2250 v1(1600,-2250) 1650,-2300 P3.1
pads on no net: CON1.7 CON1.9 U1.Mid1 U1.Mid2 U1.Mid3 U1.Mid4 U1.Mid5

## Polygon pours and split planes (outlines as drawn)
GND on Top Layer "GND_L01_P000" (solid, remove dead copper, pour order 0): -150,-2175 325,-2650 2525,-2650 3000,-2175 3000,-1250 2875,-1125 2875,-625 3000,-500 3000,-175 2875,-50 2875,75 2750,200 450,200 100,550 -300,150 -300,25 -150,-125
Vin on Bottom Layer "VIN_L02_P001" (solid, remove dead copper, pour order 1): -150,-2175 325,-2650 2525,-2650 3000,-2175 3000,-1250 2875,-1125 2875,-625 3000,-500 3000,-175 2875,-50 2875,75 2750,200 450,200 100,550 -300,150 -300,25 -150,-125

## Silkscreen, mask and mechanical layers (free items; w line width, h text height)
Top Overlay:
  text "+" at 134.32,400.71 h60 r45.4
  text "Power In" at -76.76,94.72 h40 r45.07
  text "-" at -223.21,57.6 h60 r44.55
  text "SDP21" at 2914.99,-523.28 h80 r90
  text "I2C Out" at 2861.99,-1728.76 h70 r90
  text "SDA" at 2954.99,-1936.65 h50 r90
  text "SCL" at 2959.99,-2121.65 h50 r90
Bottom Overlay:
  drawing of 28 lines, arcs and shapes, not listed
  text "Chris" at 1777.81,-119.99 h70
  text "Senior Design Project - Team 4" at 118.33,-134.5 h70 r90
  text "Remy" at 1334.14,-888.33 h70
  text "Fall '20" at 2950.82,-1480.08 h70 r90
  text "Aaron" at 654.97,-1519.99 h70
  text "Casey" at 2522.64,-1973.33 h70
  text "Made by real human people on Earth" at 2555.46,-2498.33 h70
Top Solder:
  drawing of 18 lines, arcs and shapes, not listed
Mechanical 1:
  the board outline again, w10

## Text inside footprints (layer, text, board x,y; h text height)
U2: Top Overlay "Espressif ESP32" at 444.99,-1025.18 h60 r90